# Altium PCB COMMS_ECU_revA.PcbDoc (part 1 of 6)
Units mm, origin at the board's own origin, x right, y up, seen from the top; angles counter-clockwise.
Board outline 370 x 261 mm, 6 copper layers (Top Layer, Mid Layer 1, Mid Layer 2, Mid Layer 3, Mid Layer 4, Bottom Layer), stack 1.538 mm thick; 739 components, 500 nets, 2454 pads, 325 vias.
Unrouted connection lines stored in the file: 1573.
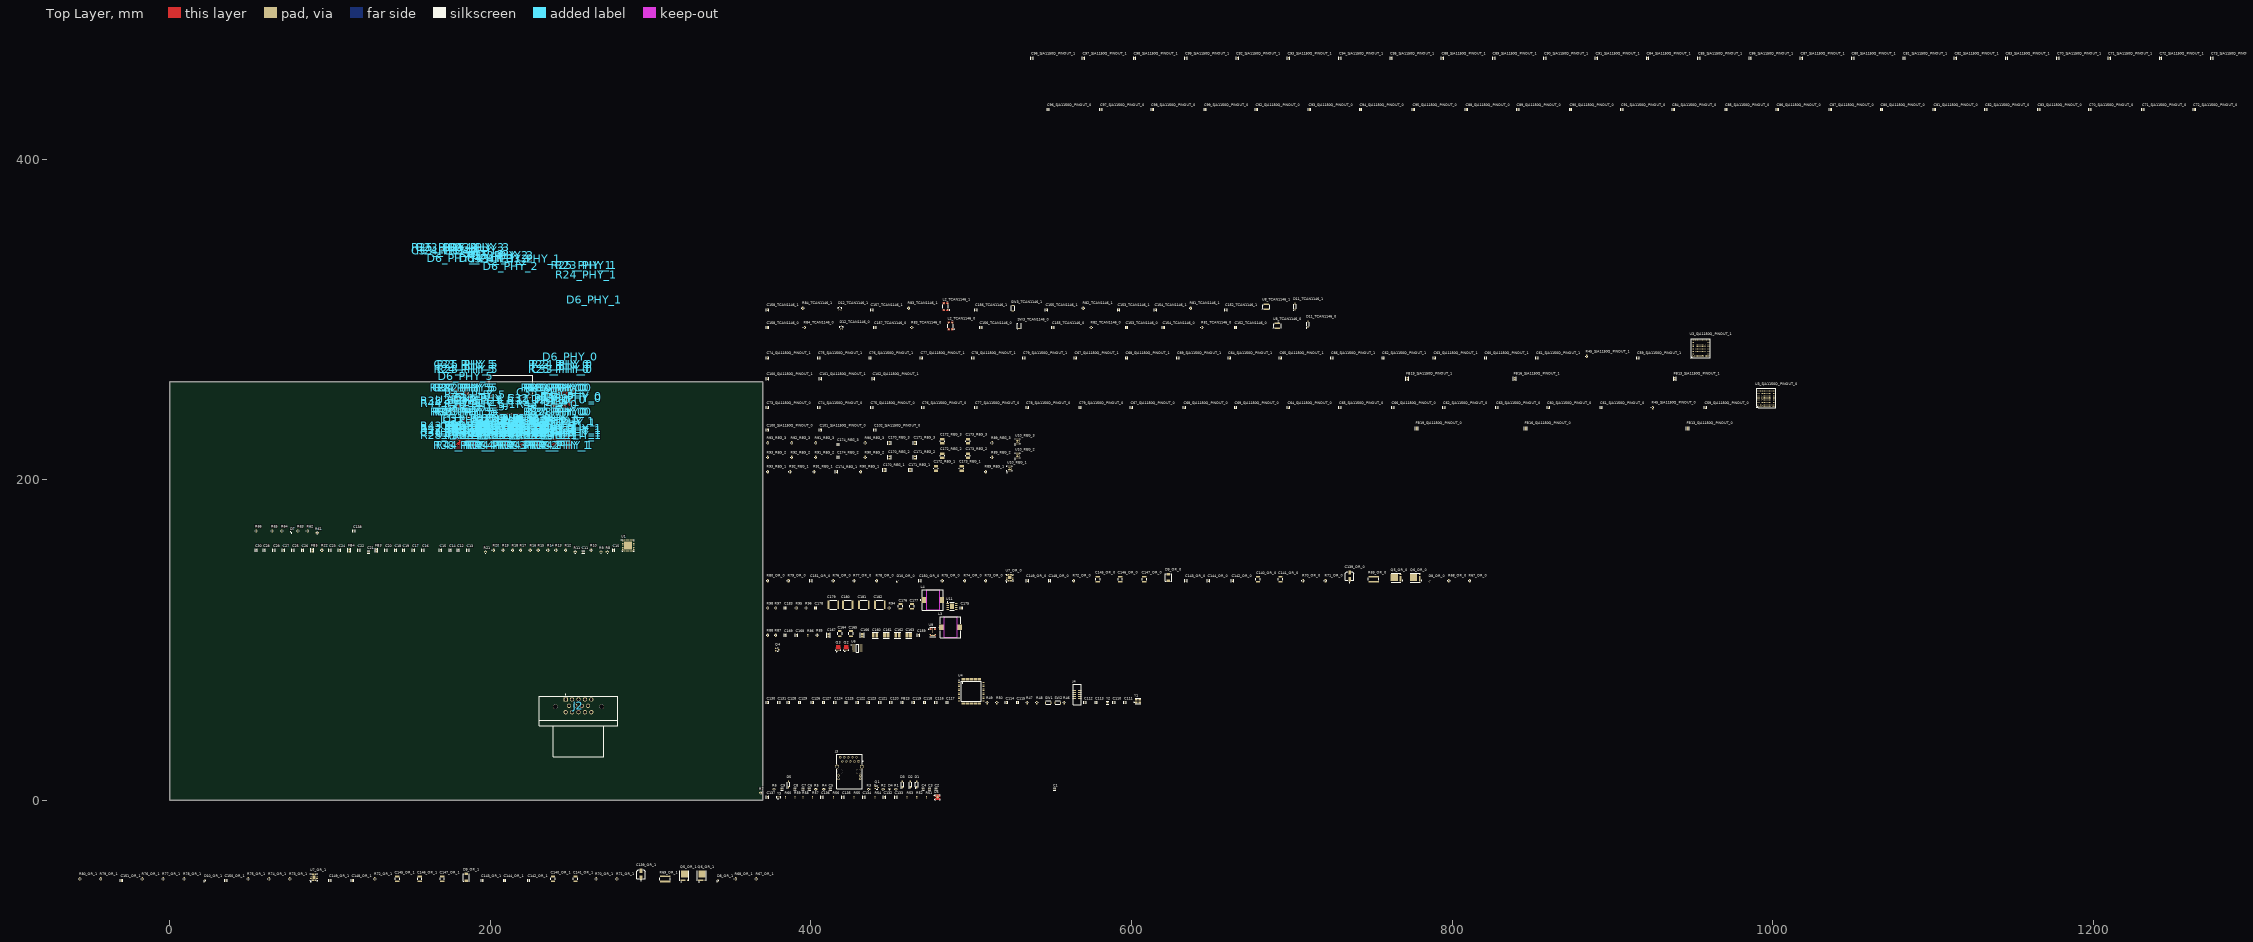
[diagram p0: Top Layer view]
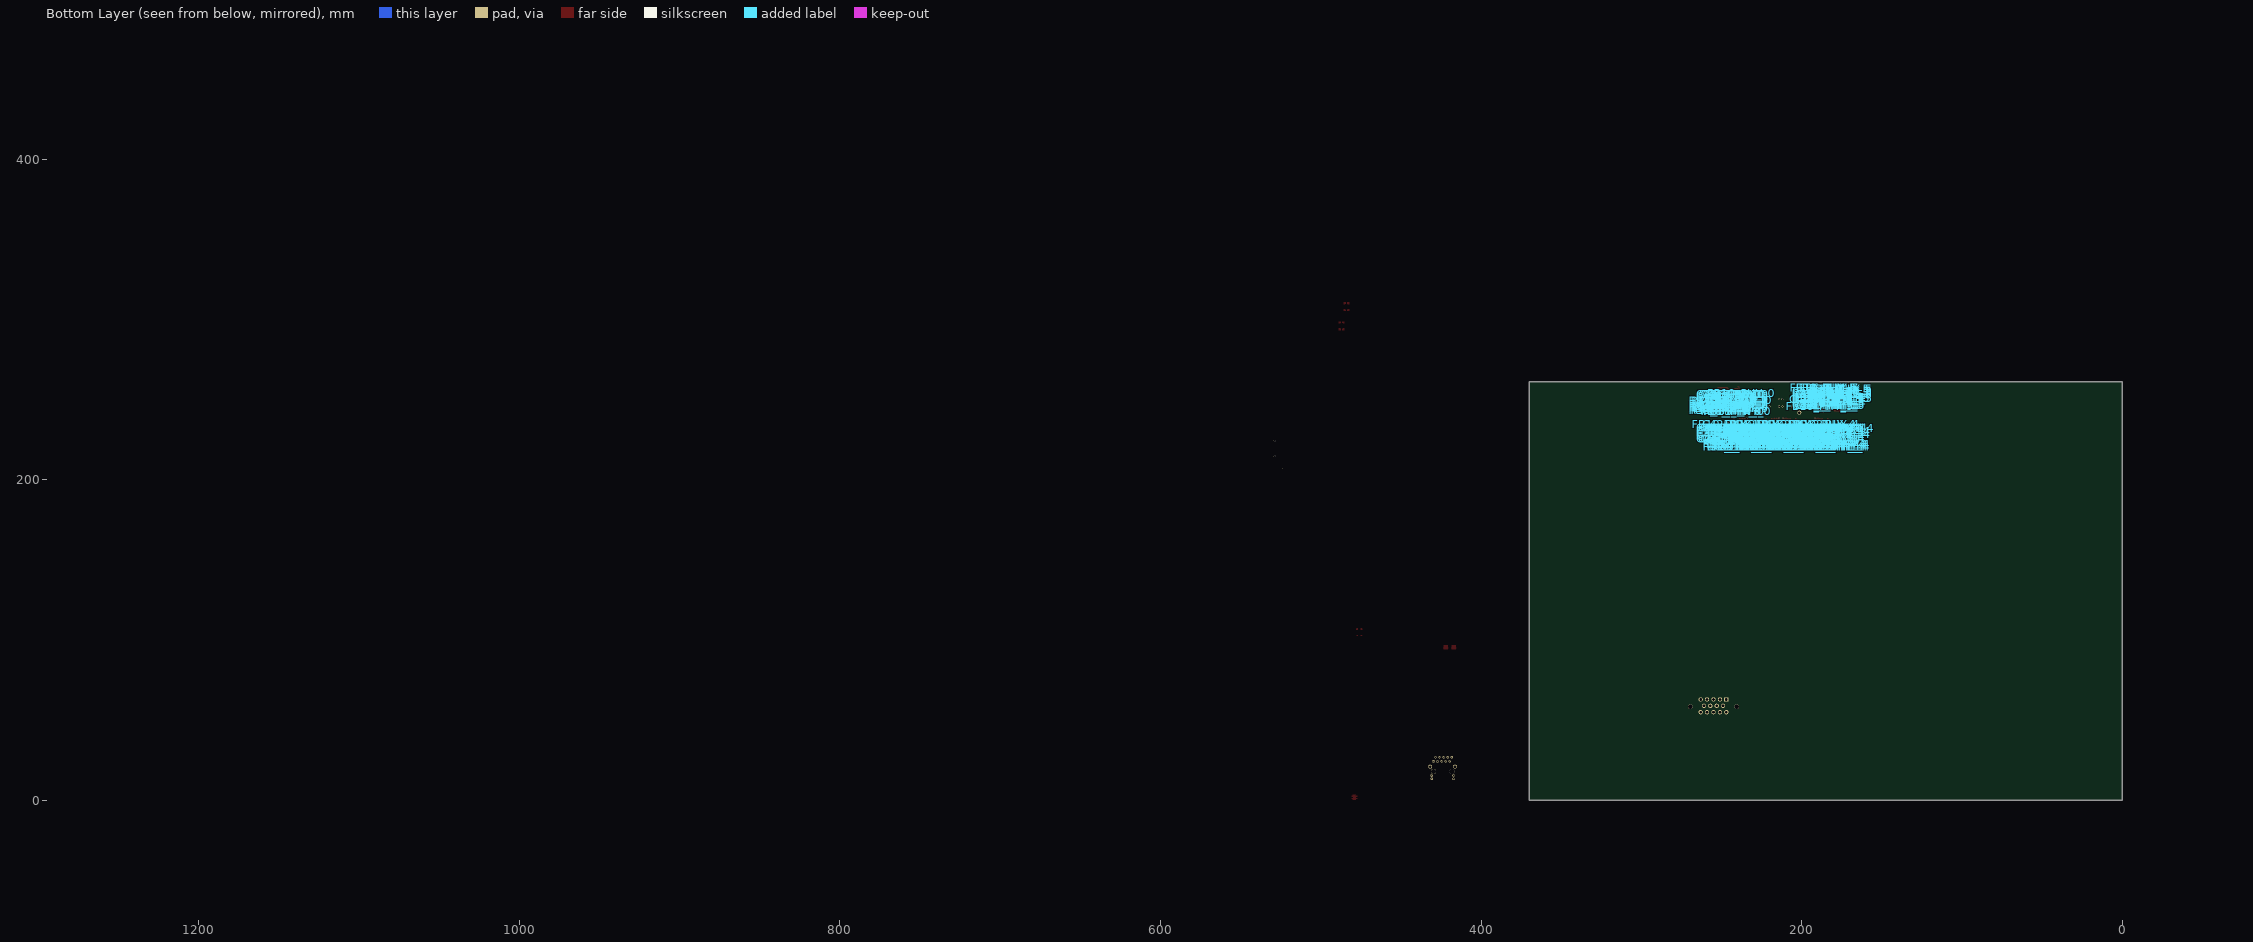
[diagram p1: Bottom Layer view, seen from below]

## Layer stack, top to bottom
Top Solder: solder mask 0.0127, Solder Resist, Dk 3.8
Top Layer: signal copper 0.035
Dielectric 1: prepreg 0.0994, PP-015, Dk 4.3
Mid Layer 1: signal copper 0.0152
Core 1: core 0.55, FR-4, Dk 4.5
Mid Layer 2: signal copper 0.0152
Dielectric 2: prepreg 0.1088, 2116, Dk 4.25
Mid Layer 3: signal copper 0.0152
Core 2: core 0.55, FR-4, Dk 4.5
Mid Layer 4: signal copper 0.0152
Dielectric 3: prepreg 0.0994, PP-015, Dk 4.3
Bottom Layer: signal copper 0.035
Bottom Solder: solder mask 0.0127, Solder Resist, Dk 3.8

## Board outline
0,0 0,261 370,261 370,0

## Design rules (kind name [scope] priority, off if disabled: settings)
BoardOutlineClearance [All] p1: gap=0.2 ignorepadtopadclearanceinfootprint=FALSE
Clearance IMPEDANCE_CLEARANCE [InDifferentialPairClass('100DIFF') or InNetClass('50SINGLE') vs InNet('GND')] p1: gap=0.5 ignorepadtopadclearanceinfootprint=FALSE except(0.089: Arc-Arc Arc-Track Arc-SMDPad Arc-THPad Arc-Text Track-Track Track-SMDPad Track-THPad Track-Text SMDPad-SMDPad SMDPad-THPad SMDPad-Text THPad-THPad THPad-Text Fill-Text Poly-Text Region-Text Text-Text; 0.127: Arc-Via Track-Via SMDPad-Via THPad-Via Via-Via Via-Text; 0.25: Arc-Hole Track-Hole SMDPad-Hole THPad-Hole Via-Hole Fill-Hole Poly-Hole Region-Hole Text-Hole)
Clearance [All] p2: gap=0.089 ignorepadtopadclearanceinfootprint=FALSE except(0.127: Arc-Via Track-Via SMDPad-Via THPad-Via Via-Via Via-Fill Via-Poly Via-Region Via-Text; 0.25: Arc-Hole Track-Hole SMDPad-Hole THPad-Hole Via-Hole Fill-Hole Poly-Hole Region-Hole Text-Hole)
ComponentClearance [All] p1: gap=0.089 collisioncheckmode=3 verticalgap=0.089 showdistances=TRUE
DiffPairsRouting 100OHM [InDifferentialPairClass('100DIFF')] p1: maxlimit=0.2 minlimit=0.127 mostfreqgap=0.127 toplayer_mingap=0.2 toplayer_prefgap=0.2 toplayer_minwidth=0.123 toplayer_maxwidth=0.123 toplayer_prefwidth=0.123 midlayer1_maxgap=0.127 midlayer1_minwidth=0.074 midlayer1_maxwidth=0.074 midlayer1_prefwidth=0.074 midlayer2_maxgap=0.127 midlayer2_minwidth=0.078 midlayer2_maxwidth=0.078 midlayer2_prefwidth=0.078 midlayer3_maxgap=0.127 midlayer3_minwidth=0.078 midlayer3_maxwidth=0.078 midlayer3_prefwidth=0.078 midlayer4_maxgap=0.127 midlayer4_minwidth=0.074 midlayer4_maxwidth=0.074 midlayer4_prefwidth=0.074 bottomlayer_mingap=0.2 bottomlayer_prefgap=0.2 bottomlayer_minwidth=0.123 bottomlayer_maxwidth=0.123 bottomlayer_prefwidth=0.123 impedanceprofiledriven=TRUE impedanceprofileid={4005660A-A687-4855-991E-D4003F8F5FAE} impedanceprofilevalue=100.000000 maxuncoupledlength=12.7
DiffPairsRouting [All] p2: maxlimit=0.089 minlimit=0.089 mostfreqgap=0.089 toplayer_minwidth=0.089 toplayer_maxwidth=1816.048 toplayer_prefwidth=0.2 midlayer1_minwidth=0.089 midlayer1_maxwidth=1816.048 midlayer1_prefwidth=0.2 midlayer2_minwidth=0.089 midlayer2_maxwidth=1816.048 midlayer2_prefwidth=0.2 midlayer3_minwidth=0.089 midlayer3_maxwidth=1816.048 midlayer3_prefwidth=0.2 midlayer4_minwidth=0.089 midlayer4_maxwidth=1816.048 midlayer4_prefwidth=0.2 bottomlayer_minwidth=0.089 bottomlayer_maxwidth=1816.048 bottomlayer_prefwidth=0.2 maxuncoupledlength=12.7
Height [All] p1: minheight=0 maxheight=1816.048 prefheight=12.7
HoleSize [All] p1: absolutevalues=TRUE maxlimit=6.3 minlimit=0.2 maxpercent=80.000 minpercent=20.000
HoleToHoleClearance [All] p1: gap=0.25 allowstackedmicrovias=FALSE
MinimumAnnularRing [All] p1: minimumring=0.076
MinimumSolderMaskSliver [All] p1: minsoldermaskwidth=0
PlaneClearance [All] p1: clearance=0.089
PlaneConnect PlaneConnectPowerPads [InNetClass('PWR')] p1: planeconnectstyle=Direct reliefexpansion=0.508 reliefentries=4 reliefconductorwidth=0.254 reliefairgap=0.254
PlaneConnect [All] p2: pad.planeconnectstyle=Relief pad.reliefexpansion=0.3 pad.reliefentries=4 pad.reliefconductorwidth=0.089 pad.reliefairgap=0.089 via.planeconnectstyle=Direct via.reliefexpansion=0.3 via.reliefentries=4 via.reliefconductorwidth=0.127 via.reliefairgap=0.127
PolygonConnect PolygonConnectPowerPads [All vs InNetClass('PWR')] p1: connectstyle=Direct reliefconductorwidth=0.254 reliefentries=4 polygonreliefangle="90 Angle" airgapwidth=0.254
PolygonConnect [All] p2: thpad.connectstyle=Relief thpad.reliefconductorwidth=0.089 thpad.reliefentries=4 thpad.polygonreliefangle="90 Angle" thpad.airgapwidth=0.089 smdpad.connectstyle=Relief smdpad.reliefconductorwidth=0.089 smdpad.reliefentries=4 smdpad.polygonreliefangle="90 Angle" smdpad.airgapwidth=0.089 via.connectstyle=Direct via.reliefconductorwidth=0.127 via.reliefentries=4 via.polygonreliefangle="90 Angle" via.airgapwidth=0.127
RoomDefinition PHY_0 [InComponentClass('PHY_0')] p1: confinementstyle=ConfineIn formatcopy=TRUE lockcomponents=FALSE outline 227,240 253,240 253,260 227,260
RoomDefinition PHY_3 [InComponentClass('PHY_3')] p2: confinementstyle=ConfineIn formatcopy=TRUE lockcomponents=FALSE outline 193,240 193,219 213,219 213,240
RoomDefinition PHY_2 [InComponentClass('PHY_2')] p3: confinementstyle=ConfineIn formatcopy=TRUE lockcomponents=FALSE outline 213,240 213,219 233,219 233,240
RoomDefinition PHY_4 [InComponentClass('PHY_4')] p4: confinementstyle=ConfineIn formatcopy=TRUE lockcomponents=FALSE outline 173,240 173,219 193,219 193,240
RoomDefinition PHY_1 [InComponentClass('PHY_1')] p5: confinementstyle=ConfineIn formatcopy=TRUE lockcomponents=FALSE outline 233,240 233,219 253,219 253,240
RoomDefinition PHY_5 [InComponentClass('PHY_5')] p6: confinementstyle=ConfineIn formatcopy=TRUE lockcomponents=FALSE outline 199,260 173,260 173,240 199,240
RoutingVias [All] p1: holewidth=0.2 width=0.45 viastyle="Through Hole" minholewidth=0.2 minwidth=0.45 maxholewidth=6.3 maxwidth=6.55
SilkToSilkClearance [All] p1: silktosilkclearance=0
SilkToSolderMaskClearance [IsPad] p1: minsilkscreentomaskgap=0.089 clearancetoexposedcopper=TRUE
SolderMaskExpansion [All] p1: expansion=0.075 istentingtop=FALSE
SupplyNets "Schematic Supply Nets_2" [InNet('3V3')] p1: voltage=0.000
SupplyNets "Schematic Supply Nets_31" [InNet('CAR_VCC')] p2: voltage=0.000
SupplyNets "Schematic Supply Nets_30" [InNet('1V1_8870')] p3: voltage=0.000
SupplyNets "Schematic Supply Nets_29" [InNet('PRE_VCC')] p4: voltage=0.000
SupplyNets "Schematic Supply Nets_28" [InNet('5V0_INT')] p5: voltage=0.000
SupplyNets "Schematic Supply Nets_27" [InNet('1V2_SW0')] p6: voltage=0.000
SupplyNets "Schematic Supply Nets_26" [InNet('1V2_SW1')] p7: voltage=0.000
SupplyNets "Schematic Supply Nets_25" [InNet('3V3_LED')] p8: voltage=0.000
SupplyNets "Schematic Supply Nets_24" [InNet('APM_VCC')] p9: voltage=0.000
SupplyNets "Schematic Supply Nets_12" [InNet('1V1_8830')] p10: voltage=0.000
SupplyNets "Schematic Supply Nets_4" [InNet('3V3_INT')] p11: voltage=0.000
SupplyNets "Schematic Supply Nets_23" [InNet('8830_1V1')] p12: voltage=0.000
SupplyNets "Schematic Supply Nets_22" [InNet('8870_1V1')] p13: voltage=0.000
SupplyNets "Schematic Supply Nets_19" [InNet('SW_VDD_CORE')] p14: voltage=0.000
SupplyNets "Schematic Supply Nets_18" [InNet('VCC')] p15: voltage=0.000
SupplyNets "Schematic Supply Nets_16" [InNet('SW_VDDA_PLL')] p16: voltage=0.000
SupplyNets "Schematic Supply Nets_15" [InNet('SW_VDDA_OSC')] p17: voltage=0.000
SupplyNets "Schematic Supply Nets_10" [InNet('GND')] p18: voltage=0.000
SupplyNets "Schematic Supply Nets_6" [InNet('P1_GND')] p19: voltage=0.000
SupplyNets "Schematic Supply Nets_5" [InNet('RJ45_GND')] p20: voltage=0.000
SupplyNets "Schematic Supply Nets" [InNet('1V2')] p21: voltage=0.000
Width 50OHM [InNetClass('50SINGLE')] p1: maxlimit=0.156 minlimit=0.108 preferedwidth=0.117 toplayer_minwidth=0.156 toplayer_prefwidth=0.156 midlayer1_maxwidth=0.108 midlayer1_prefwidth=0.108 midlayer2_minwidth=0.117 midlayer2_maxwidth=0.117 midlayer3_minwidth=0.117 midlayer3_maxwidth=0.117 midlayer4_maxwidth=0.108 midlayer4_prefwidth=0.108 bottomlayer_minwidth=0.156 bottomlayer_prefwidth=0.156 impedanceprofiledriven=TRUE impedanceprofileid={5E2FF5BF-0F85-430B-B433-FDF321D4F5A7} impedanceprofilevalue=50.000000 minimp=50.000000 maximp=50.000000 favimp=50.000000
Width [All] p2: maxlimit=1816.048 minlimit=0.089 preferedwidth=0.089
20 further rules are at their usual default settings.

## Classes and differential pairs
differential pair class CAN: CAN0 CAN1 PRE_CAN_TCAN1146_0 PRE_CAN_TCAN1146_1
differential pair class 1000BASET: LAN8830_TXRXA LAN8830_TXRXB LAN8830_TXRXC LAN8830_TXRXD
differential pair class 100DIFF: LAN8830_TXRXA LAN8830_TXRXB LAN8830_TXRXC LAN8830_TXRXD P0_TRX P1_TRX P2_TRX P3_TRX P4_TRX P5_TRX TRX_PHY_0 TRX_PHY_1 TRX_PHY_2 TRX_PHY_3 TRX_PHY_4 TRX_PHY_5 TRX_TERM_PHY_0 TRX_TERM_PHY_1 TRX_TERM_PHY_2 TRX_TERM_PHY_3 TRX_TERM_PHY_4 TRX_TERM_PHY_5
channel class TCAN1146_PINOUT: TCAN1146_0 TCAN1146_1
channel class SJA1105Q_PINOUT: SJA1150Q_PINOUT_0 SJA1150Q_PINOUT_1
channel class MCP1726_PINOUT: REG_1 REG_2 REG_3
channel class LM74910H_PINOUT: OR_0 OR_1
channel class LAN8870_PINOUT: PHY_0 PHY_1 PHY_2 PHY_3 PHY_4 PHY_5
net class PWR: 1V1_8830 1V1_8870 1V2 1V2_SW0 1V2_SW1 3V3 8830_1V1 8870_1V1 APM_VCC CAR_VCC LAN8870_VBAT_PHY_0 LAN8870_VBAT_PHY_1 LAN8870_VBAT_PHY_2 LAN8870_VBAT_PHY_3 LAN8870_VBAT_PHY_4 LAN8870_VBAT_PHY_5 LAN8870_VDDA_PHY_0 LAN8870_VDDA_PHY_1 LAN8870_VDDA_PHY_2 LAN8870_VDDA_PHY_3 LAN8870_VDDA_PHY_4 LAN8870_VDDA_PHY_5 LM61495Q3_VCC LM74910H_VS_OR_0 LM74910H_VS_OR_1 NetC23_1 NetC25_1 NetC28_1 NetC36_PHY_0_1 NetC36_PHY_1_1 NetC36_PHY_2_1 NetC36_PHY_3_1 NetC36_PHY_4_1 NetC36_PHY_5_1 NetC42_PHY_0_1 NetC42_PHY_1_1 NetC42_PHY_2_1 NetC42_PHY_3_1 NetC42_PHY_4_1 NetC42_PHY_5_1 NetC142_OR_0_2 NetC142_OR_1_2 NetC159_2 NetQ2_5-6-7-8 PRE_VCC RJ45_GND SW_VDD_CORE SW_VDDA_OSC SW_VDDA_PLL VCC
net class P4_TXD: LAN8870_TX_CLK_PHY_4 LAN8870_TX_CTL_PHY_4 LAN8870_TXD0_PHY_4 LAN8870_TXD1_PHY_4 LAN8870_TXD2_PHY_4 LAN8870_TXD3_PHY_4
net class P4_RXD: LAN8870_RX_CLK_PHY_4 LAN8870_RXCTL_PHY_4 LAN8870_RXD0_PHY_4 LAN8870_RXD1_PHY_4 LAN8870_RXD2_PHY_4 LAN8870_RXD3_PHY_4
net class P3_TXD: LAN8870_TX_CLK_PHY_3 LAN8870_TX_CTL_PHY_3 LAN8870_TXD0_PHY_3 LAN8870_TXD1_PHY_3 LAN8870_TXD2_PHY_3 LAN8870_TXD3_PHY_3
net class P3_RXD: LAN8870_RX_CLK_PHY_3 LAN8870_RXCTL_PHY_3 LAN8870_RXD0_PHY_3 LAN8870_RXD1_PHY_3 LAN8870_RXD2_PHY_3 LAN8870_RXD3_PHY_3
net class P2_TXD: LAN8870_TX_CLK_PHY_2 LAN8870_TX_CTL_PHY_2 LAN8870_TXD0_PHY_2 LAN8870_TXD1_PHY_2 LAN8870_TXD2_PHY_2 LAN8870_TXD3_PHY_2
net class P2_RXD: LAN8870_RX_CLK_PHY_2 LAN8870_RXCTL_PHY_2 LAN8870_RXD0_PHY_2 LAN8870_RXD1_PHY_2 LAN8870_RXD2_PHY_2 LAN8870_RXD3_PHY_2
net class P1_TXD: LAN8870_TX_CLK_PHY_0 LAN8870_TX_CLK_PHY_1 LAN8870_TX_CLK_PHY_5 LAN8870_TX_CTL_PHY_0 LAN8870_TX_CTL_PHY_1 LAN8870_TX_CTL_PHY_5 LAN8870_TXD0_PHY_0 LAN8870_TXD0_PHY_1 LAN8870_TXD0_PHY_5 LAN8870_TXD1_PHY_0 LAN8870_TXD1_PHY_1 LAN8870_TXD1_PHY_5 LAN8870_TXD2_PHY_0 LAN8870_TXD2_PHY_1 LAN8870_TXD2_PHY_5 LAN8870_TXD3_PHY_0 LAN8870_TXD3_PHY_1 LAN8870_TXD3_PHY_5
net class P1_RXD: LAN8870_RX_CLK_PHY_0 LAN8870_RX_CLK_PHY_1 LAN8870_RX_CLK_PHY_5 LAN8870_RXCTL_PHY_0 LAN8870_RXCTL_PHY_1 LAN8870_RXCTL_PHY_5 LAN8870_RXD0_PHY_0 LAN8870_RXD0_PHY_1 LAN8870_RXD0_PHY_5 LAN8870_RXD1_PHY_0 LAN8870_RXD1_PHY_1 LAN8870_RXD1_PHY_5 LAN8870_RXD2_PHY_0 LAN8870_RXD2_PHY_1 LAN8870_RXD2_PHY_5 LAN8870_RXD3_PHY_0 LAN8870_RXD3_PHY_1 LAN8870_RXD3_PHY_5
net class P0_TXD: NetU1_19 NetU1_20 NetU1_21 NetU1_22 NetU1_25 NetU1_26
net class P0_RXD: LAN8830_CLK125_EN LAN8830_MODE0 LAN8830_MODE1 LAN8830_MODE2 LAN8830_MODE3 LAN8830_MODE4
net class INTP_TXD: NetU3_SJA1150Q_PINOUT_0_A2 NetU3_SJA1150Q_PINOUT_0_B1 NetU3_SJA1150Q_PINOUT_0_C1 NetU3_SJA1150Q_PINOUT_0_C2 NetU3_SJA1150Q_PINOUT_0_D1 NetU3_SJA1150Q_PINOUT_0_D2
net class INTP_RXD: NetU3_SJA1150Q_PINOUT_1_A2 NetU3_SJA1150Q_PINOUT_1_B1 NetU3_SJA1150Q_PINOUT_1_C1 NetU3_SJA1150Q_PINOUT_1_C2 NetU3_SJA1150Q_PINOUT_1_D1 NetU3_SJA1150Q_PINOUT_1_D2
net class CLK: 3V3_LAN8830_CLK 3V3_LAN8870_0_CLK 3V3_LAN8870_1_CLK 3V3_LAN8870_2_CLK 3V3_LAN8870_3_CLK 3V3_LAN8870_4_CLK 3V3_LAN8870_5_CLK 3V3_SJA1105_0_CLK 3V3_SJA1105_1_CLK
net class 50SINGLE: 3V3_LAN8830_CLK 3V3_LAN8870_0_CLK 3V3_LAN8870_1_CLK 3V3_LAN8870_2_CLK 3V3_LAN8870_3_CLK 3V3_LAN8870_4_CLK 3V3_LAN8870_5_CLK 3V3_SJA1105_0_CLK 3V3_SJA1105_1_CLK LAN8830_CLK125_EN LAN8830_MODE0 LAN8830_MODE1 LAN8830_MODE2 LAN8830_MODE3 LAN8830_MODE4 LAN8870_RX_CLK_PHY_0 LAN8870_RX_CLK_PHY_1 LAN8870_RX_CLK_PHY_2 LAN8870_RX_CLK_PHY_3 LAN8870_RX_CLK_PHY_4 LAN8870_RX_CLK_PHY_5 LAN8870_RXCTL_PHY_0 LAN8870_RXCTL_PHY_1 LAN8870_RXCTL_PHY_2 LAN8870_RXCTL_PHY_3 LAN8870_RXCTL_PHY_4 LAN8870_RXCTL_PHY_5 LAN8870_RXD0_PHY_0 LAN8870_RXD0_PHY_1 LAN8870_RXD0_PHY_2 LAN8870_RXD0_PHY_3 LAN8870_RXD0_PHY_4 LAN8870_RXD0_PHY_5 LAN8870_RXD1_PHY_0 LAN8870_RXD1_PHY_1 LAN8870_RXD1_PHY_2 LAN8870_RXD1_PHY_3 LAN8870_RXD1_PHY_4 LAN8870_RXD1_PHY_5 LAN8870_RXD2_PHY_0 LAN8870_RXD2_PHY_1 LAN8870_RXD2_PHY_2 LAN8870_RXD2_PHY_3 LAN8870_RXD2_PHY_4 LAN8870_RXD2_PHY_5 LAN8870_RXD3_PHY_0 LAN8870_RXD3_PHY_1 LAN8870_RXD3_PHY_2 LAN8870_RXD3_PHY_3 LAN8870_RXD3_PHY_4 LAN8870_RXD3_PHY_5 LAN8870_TX_CLK_PHY_0 LAN8870_TX_CLK_PHY_1 LAN8870_TX_CLK_PHY_2 LAN8870_TX_CLK_PHY_3 LAN8870_TX_CLK_PHY_4 LAN8870_TX_CLK_PHY_5 LAN8870_TX_CTL_PHY_0 LAN8870_TX_CTL_PHY_1 LAN8870_TX_CTL_PHY_2 LAN8870_TX_CTL_PHY_3 LAN8870_TX_CTL_PHY_4 LAN8870_TX_CTL_PHY_5 LAN8870_TXD0_PHY_0 LAN8870_TXD0_PHY_1 LAN8870_TXD0_PHY_2 LAN8870_TXD0_PHY_3 LAN8870_TXD0_PHY_4 LAN8870_TXD0_PHY_5 LAN8870_TXD1_PHY_0 LAN8870_TXD1_PHY_1 LAN8870_TXD1_PHY_2 LAN8870_TXD1_PHY_3 LAN8870_TXD1_PHY_4 LAN8870_TXD1_PHY_5 LAN8870_TXD2_PHY_0 LAN8870_TXD2_PHY_1 LAN8870_TXD2_PHY_2 LAN8870_TXD2_PHY_3 LAN8870_TXD2_PHY_4 LAN8870_TXD2_PHY_5 LAN8870_TXD3_PHY_0 LAN8870_TXD3_PHY_1 LAN8870_TXD3_PHY_2 LAN8870_TXD3_PHY_3 LAN8870_TXD3_PHY_4 LAN8870_TXD3_PHY_5 NetC10_1 NetC34_PHY_0_1 NetC34_PHY_1_1 NetC34_PHY_2_1 NetC34_PHY_3_1 NetC34_PHY_4_1 NetC34_PHY_5_1 NetC59_SJA1150Q_PINOUT_0_1 NetC59_SJA1150Q_PINOUT_1_1 NetU1_19 NetU1_20 NetU1_21 NetU1_22 NetU1_25 NetU1_26 NetU3_SJA1150Q_PINOUT_0_A2 NetU3_SJA1150Q_PINOUT_0_B1 NetU3_SJA1150Q_PINOUT_0_C1 NetU3_SJA1150Q_PINOUT_0_C2 NetU3_SJA1150Q_PINOUT_0_D1 NetU3_SJA1150Q_PINOUT_0_D2 NetU3_SJA1150Q_PINOUT_0_N4 NetU3_SJA1150Q_PINOUT_1_A2 NetU3_SJA1150Q_PINOUT_1_B1 NetU3_SJA1150Q_PINOUT_1_C1 NetU3_SJA1150Q_PINOUT_1_C2 NetU3_SJA1150Q_PINOUT_1_D1 NetU3_SJA1150Q_PINOUT_1_D2
component class TCAN1146_1: C152_TCAN1146_1 C153_TCAN1146_1 C154_TCAN1146_1 C155_TCAN1146_1 C156_TCAN1146_1 C157_TCAN1146_1 C158_TCAN1146_1 D11_TCAN1146_1 D12_TCAN1146_1 L2_TCAN1146_1 R81_TCAN1146_1 R82_TCAN1146_1 R83_TCAN1146_1 R84_TCAN1146_1 SW3_TCAN1146_1 U8_TCAN1146_1
component class TCAN1146_0: C152_TCAN1146_0 C153_TCAN1146_0 C154_TCAN1146_0 C155_TCAN1146_0 C156_TCAN1146_0 C157_TCAN1146_0 C158_TCAN1146_0 D11_TCAN1146_0 D12_TCAN1146_0 L2_TCAN1146_0 R81_TCAN1146_0 R82_TCAN1146_0 R83_TCAN1146_0 R84_TCAN1146_0 SW3_TCAN1146_0 U8_TCAN1146_0
component class SJA1150Q_PINOUT_1: C59_SJA1150Q_PINOUT_1 C60_SJA1150Q_PINOUT_1 C61_SJA1150Q_PINOUT_1 C62_SJA1150Q_PINOUT_1 C63_SJA1150Q_PINOUT_1 C64_SJA1150Q_PINOUT_1 C65_SJA1150Q_PINOUT_1 C66_SJA1150Q_PINOUT_1 C67_SJA1150Q_PINOUT_1 C68_SJA1150Q_PINOUT_1 C69_SJA1150Q_PINOUT_1 C70_SJA1150Q_PINOUT_1 C71_SJA1150Q_PINOUT_1 C72_SJA1150Q_PINOUT_1 C73_SJA1150Q_PINOUT_1 C74_SJA1150Q_PINOUT_1 C75_SJA1150Q_PINOUT_1 C76_SJA1150Q_PINOUT_1 C77_SJA1150Q_PINOUT_1 C78_SJA1150Q_PINOUT_1 C79_SJA1150Q_PINOUT_1 C80_SJA1150Q_PINOUT_1 C81_SJA1150Q_PINOUT_1 C82_SJA1150Q_PINOUT_1 C83_SJA1150Q_PINOUT_1 C84_SJA1150Q_PINOUT_1 C85_SJA1150Q_PINOUT_1 C86_SJA1150Q_PINOUT_1 C87_SJA1150Q_PINOUT_1 C88_SJA1150Q_PINOUT_1 C89_SJA1150Q_PINOUT_1 C90_SJA1150Q_PINOUT_1 C91_SJA1150Q_PINOUT_1 C92_SJA1150Q_PINOUT_1 C93_SJA1150Q_PINOUT_1 C94_SJA1150Q_PINOUT_1 C95_SJA1150Q_PINOUT_1 C96_SJA1150Q_PINOUT_1 C97_SJA1150Q_PINOUT_1 C98_SJA1150Q_PINOUT_1 C99_SJA1150Q_PINOUT_1 C100_SJA1150Q_PINOUT_1 C101_SJA1150Q_PINOUT_1 C102_SJA1150Q_PINOUT_1 FB13_SJA1150Q_PINOUT_1 FB16_SJA1150Q_PINOUT_1 FB19_SJA1150Q_PINOUT_1 R45_SJA1150Q_PINOUT_1 U3_SJA1150Q_PINOUT_1
component class SJA1150Q_PINOUT_0: C59_SJA1150Q_PINOUT_0 C60_SJA1150Q_PINOUT_0 C61_SJA1150Q_PINOUT_0 C62_SJA1150Q_PINOUT_0 C63_SJA1150Q_PINOUT_0 C64_SJA1150Q_PINOUT_0 C65_SJA1150Q_PINOUT_0 C66_SJA1150Q_PINOUT_0 C67_SJA1150Q_PINOUT_0 C68_SJA1150Q_PINOUT_0 C69_SJA1150Q_PINOUT_0 C70_SJA1150Q_PINOUT_0 C71_SJA1150Q_PINOUT_0 C72_SJA1150Q_PINOUT_0 C73_SJA1150Q_PINOUT_0 C74_SJA1150Q_PINOUT_0 C75_SJA1150Q_PINOUT_0 C76_SJA1150Q_PINOUT_0 C77_SJA1150Q_PINOUT_0 C78_SJA1150Q_PINOUT_0 C79_SJA1150Q_PINOUT_0 C80_SJA1150Q_PINOUT_0 C81_SJA1150Q_PINOUT_0 C82_SJA1150Q_PINOUT_0 C83_SJA1150Q_PINOUT_0 C84_SJA1150Q_PINOUT_0 C85_SJA1150Q_PINOUT_0 C86_SJA1150Q_PINOUT_0 C87_SJA1150Q_PINOUT_0 C88_SJA1150Q_PINOUT_0 C89_SJA1150Q_PINOUT_0 C90_SJA1150Q_PINOUT_0 C91_SJA1150Q_PINOUT_0 C92_SJA1150Q_PINOUT_0 C93_SJA1150Q_PINOUT_0 C94_SJA1150Q_PINOUT_0 C95_SJA1150Q_PINOUT_0 C96_SJA1150Q_PINOUT_0 C97_SJA1150Q_PINOUT_0 C98_SJA1150Q_PINOUT_0 C99_SJA1150Q_PINOUT_0 C100_SJA1150Q_PINOUT_0 C101_SJA1150Q_PINOUT_0 C102_SJA1150Q_PINOUT_0 FB13_SJA1150Q_PINOUT_0 FB16_SJA1150Q_PINOUT_0 FB19_SJA1150Q_PINOUT_0 R45_SJA1150Q_PINOUT_0 U3_SJA1150Q_PINOUT_0
component class REG_4: C175 C176 C177 C178 C179 C180 C181 C182 C183 L4 R94 R95 R96 R97 R98 U11
component class REG_3: C170_REG_3 C171_REG_3 C172_REG_3 C173_REG_3 C174_REG_3 R89_REG_3 R90_REG_3 R91_REG_3 R92_REG_3 R93_REG_3 U10_REG_3
component class REG_2: C170_REG_2 C171_REG_2 C172_REG_2 C173_REG_2 C174_REG_2 R89_REG_2 R90_REG_2 R91_REG_2 R92_REG_2 R93_REG_2 U10_REG_2
component class REG_1: C170_REG_1 C171_REG_1 C172_REG_1 C173_REG_1 C174_REG_1 R89_REG_1 R90_REG_1 R91_REG_1 R92_REG_1 R93_REG_1 U10_REG_1
component class REG_0: C159 C160 C161 C162 C163 C164 C165 C166 C167 C168 C169 L3 R85 R86 R87 R88 U9
component class PWR_SW_AND_PROT_0: C138 D7 Q2 Q3 Q4 R61 R62 R63 R64 R65 R66 U6
component class PHY_6: C10 C11 C12 C13 C14 C15 C16 C17 C18 C19 C20 C21 C22 C23 C24 C25 C26 C27 C28 C29 C30 FB3 FB4 FB5 R8 R9 R10 R11 R12 R13 R14 R15 R16 R17 R18 R19 R20 R21 R22 U1
component class PHY_5: C31_PHY_5 C32_PHY_5 C33_PHY_5 C34_PHY_5 C35_PHY_5 C36_PHY_5 C37_PHY_5 C38_PHY_5 C39_PHY_5 C40_PHY_5 C41_PHY_5 C42_PHY_5 C43_PHY_5 C44_PHY_5 C45_PHY_5 C46_PHY_5 C47_PHY_5 C48_PHY_5 C49_PHY_5 C50_PHY_5 C51_PHY_5 C52_PHY_5 C53_PHY_5 C54_PHY_5 C55_PHY_5 C56_PHY_5 C57_PHY_5 C58_PHY_5 D6_PHY_5 FB6_PHY_5 FB8_PHY_5 FB10_PHY_5 FB11_PHY_5 L1_PHY_5 R23_PHY_5 R24_PHY_5 R25_PHY_5 R26_PHY_5 R27_PHY_5 R28_PHY_5 R29_PHY_5 R30_PHY_5 R31_PHY_5 R32_PHY_5 R33_PHY_5 R34_PHY_5 R35_PHY_5 R36_PHY_5 R37_PHY_5 R38_PHY_5 R39_PHY_5 R40_PHY_5 R41_PHY_5 R42_PHY_5 R43_PHY_5 R44_PHY_5 R99_PHY_5 U2_PHY_5
component class PHY_4: C31_PHY_4 C32_PHY_4 C33_PHY_4 C34_PHY_4 C35_PHY_4 C36_PHY_4 C37_PHY_4 C38_PHY_4 C39_PHY_4 C40_PHY_4 C41_PHY_4 C42_PHY_4 C43_PHY_4 C44_PHY_4 C45_PHY_4 C46_PHY_4 C47_PHY_4 C48_PHY_4 C49_PHY_4 C50_PHY_4 C51_PHY_4 C52_PHY_4 C53_PHY_4 C54_PHY_4 C55_PHY_4 C56_PHY_4 C57_PHY_4 C58_PHY_4 D6_PHY_4 FB6_PHY_4 FB8_PHY_4 FB10_PHY_4 FB11_PHY_4 L1_PHY_4 R23_PHY_4 R24_PHY_4 R25_PHY_4 R26_PHY_4 R27_PHY_4 R28_PHY_4 R29_PHY_4 R30_PHY_4 R31_PHY_4 R32_PHY_4 R33_PHY_4 R34_PHY_4 R35_PHY_4 R36_PHY_4 R37_PHY_4 R38_PHY_4 R39_PHY_4 R40_PHY_4 R41_PHY_4 R42_PHY_4 R43_PHY_4 R44_PHY_4 R99_PHY_4 U2_PHY_4
component class PHY_3: C31_PHY_3 C32_PHY_3 C33_PHY_3 C34_PHY_3 C35_PHY_3 C36_PHY_3 C37_PHY_3 C38_PHY_3 C39_PHY_3 C40_PHY_3 C41_PHY_3 C42_PHY_3 C43_PHY_3 C44_PHY_3 C45_PHY_3 C46_PHY_3 C47_PHY_3 C48_PHY_3 C49_PHY_3 C50_PHY_3 C51_PHY_3 C52_PHY_3 C53_PHY_3 C54_PHY_3 C55_PHY_3 C56_PHY_3 C57_PHY_3 C58_PHY_3 D6_PHY_3 FB6_PHY_3 FB8_PHY_3 FB10_PHY_3 FB11_PHY_3 L1_PHY_3 R23_PHY_3 R24_PHY_3 R25_PHY_3 R26_PHY_3 R27_PHY_3 R28_PHY_3 R29_PHY_3 R30_PHY_3 R31_PHY_3 R32_PHY_3 R33_PHY_3 R34_PHY_3 R35_PHY_3 R36_PHY_3 R37_PHY_3 R38_PHY_3 R39_PHY_3 R40_PHY_3 R41_PHY_3 R42_PHY_3 R43_PHY_3 R44_PHY_3 R99_PHY_3 U2_PHY_3
component class PHY_2: C31_PHY_2 C32_PHY_2 C33_PHY_2 C34_PHY_2 C35_PHY_2 C36_PHY_2 C37_PHY_2 C38_PHY_2 C39_PHY_2 C40_PHY_2 C41_PHY_2 C42_PHY_2 C43_PHY_2 C44_PHY_2 C45_PHY_2 C46_PHY_2 C47_PHY_2 C48_PHY_2 C49_PHY_2 C50_PHY_2 C51_PHY_2 C52_PHY_2 C53_PHY_2 C54_PHY_2 C55_PHY_2 C56_PHY_2 C57_PHY_2 C58_PHY_2 D6_PHY_2 FB6_PHY_2 FB8_PHY_2 FB10_PHY_2 FB11_PHY_2 L1_PHY_2 R23_PHY_2 R24_PHY_2 R25_PHY_2 R26_PHY_2 R27_PHY_2 R28_PHY_2 R29_PHY_2 R30_PHY_2 R31_PHY_2 R32_PHY_2 R33_PHY_2 R34_PHY_2 R35_PHY_2 R36_PHY_2 R37_PHY_2 R38_PHY_2 R39_PHY_2 R40_PHY_2 R41_PHY_2 R42_PHY_2 R43_PHY_2 R44_PHY_2 R99_PHY_2 U2_PHY_2
component class PHY_1: C31_PHY_1 C32_PHY_1 C33_PHY_1 C34_PHY_1 C35_PHY_1 C36_PHY_1 C37_PHY_1 C38_PHY_1 C39_PHY_1 C40_PHY_1 C41_PHY_1 C42_PHY_1 C43_PHY_1 C44_PHY_1 C45_PHY_1 C46_PHY_1 C47_PHY_1 C48_PHY_1 C49_PHY_1 C50_PHY_1 C51_PHY_1 C52_PHY_1 C53_PHY_1 C54_PHY_1 C55_PHY_1 C56_PHY_1 C57_PHY_1 C58_PHY_1 D6_PHY_1 FB6_PHY_1 FB8_PHY_1 FB10_PHY_1 FB11_PHY_1 L1_PHY_1 R23_PHY_1 R24_PHY_1 R25_PHY_1 R26_PHY_1 R27_PHY_1 R28_PHY_1 R29_PHY_1 R30_PHY_1 R31_PHY_1 R32_PHY_1 R33_PHY_1 R34_PHY_1 R35_PHY_1 R36_PHY_1 R37_PHY_1 R38_PHY_1 R39_PHY_1 R40_PHY_1 R41_PHY_1 R42_PHY_1 R43_PHY_1 R44_PHY_1 R99_PHY_1 U2_PHY_1
component class PHY_0: C31_PHY_0 C32_PHY_0 C33_PHY_0 C34_PHY_0 C35_PHY_0 C36_PHY_0 C37_PHY_0 C38_PHY_0 C39_PHY_0 C40_PHY_0 C41_PHY_0 C42_PHY_0 C43_PHY_0 C44_PHY_0 C45_PHY_0 C46_PHY_0 C47_PHY_0 C48_PHY_0 C49_PHY_0 C50_PHY_0 C51_PHY_0 C52_PHY_0 C53_PHY_0 C54_PHY_0 C55_PHY_0 C56_PHY_0 C57_PHY_0 C58_PHY_0 D6_PHY_0 FB6_PHY_0 FB8_PHY_0 FB10_PHY_0 FB11_PHY_0 L1_PHY_0 R23_PHY_0 R24_PHY_0 R25_PHY_0 R26_PHY_0 R27_PHY_0 R28_PHY_0 R29_PHY_0 R30_PHY_0 R31_PHY_0 R32_PHY_0 R33_PHY_0 R34_PHY_0 R35_PHY_0 R36_PHY_0 R37_PHY_0 R38_PHY_0 R39_PHY_0 R40_PHY_0 R41_PHY_0 R42_PHY_0 R43_PHY_0 R44_PHY_0 R99_PHY_0 U2_PHY_0
component class OR_1: C139_OR_1 C140_OR_1 C141_OR_1 C142_OR_1 C143_OR_1 C144_OR_1 C145_OR_1 C146_OR_1 C147_OR_1 C148_OR_1 C149_OR_1 C150_OR_1 C151_OR_1 D8_OR_1 D9_OR_1 D10_OR_1 Q5_OR_1 Q6_OR_1 R67_OR_1 R68_OR_1 R69_OR_1 R70_OR_1 R71_OR_1 R72_OR_1 R73_OR_1 R74_OR_1 R75_OR_1 R76_OR_1 R77_OR_1 R78_OR_1 R79_OR_1 R80_OR_1 U7_OR_1
component class OR_0: C139_OR_0 C140_OR_0 C141_OR_0 C142_OR_0 C143_OR_0 C144_OR_0 C145_OR_0 C146_OR_0 C147_OR_0 C148_OR_0 C149_OR_0 C150_OR_0 C151_OR_0 D8_OR_0 D9_OR_0 D10_OR_0 Q5_OR_0 Q6_OR_0 R67_OR_0 R68_OR_0 R69_OR_0 R70_OR_0 R71_OR_0 R72_OR_0 R73_OR_0 R74_OR_0 R75_OR_0 R76_OR_0 R77_OR_0 R78_OR_0 R79_OR_0 R80_OR_0 U7_OR_0
component class MCU_0: C110 C111 C112 C113 C114 C115 C116 C117 C118 C119 C120 C121 C122 C123 C124 C125 C126 C127 C128 C129 C130 C131 FB23 J4 R46 R47 R48 R49 R50 SW1 SW2 U4 Y1 Y2
component class COMMS_ECU_revA: C1 C2 C3 C4 C5 C6 C7 C8 C9 D1 D2 D3 D4 D5 J1 J2 J3 Q1 R1 R2 R3 R4 R5 R6 R7
component class CLOCK_GEN_0: C132 C133 C134 C135 C136 C137 R51 R52 R53 R54 R55 R56 R57 R58 R59 R60 U5 Y3
differential pair X: +X_P -X_N
differential pair X32: +X32_P -X32_N
differential pair TRX_TERM_PHY_5: +TRX_TERM_PHY_5_P -TRX_TERM_PHY_5_N
differential pair TRX_TERM_PHY_4: +TRX_TERM_PHY_4_P -TRX_TERM_PHY_4_N
differential pair TRX_TERM_PHY_3: +TRX_TERM_PHY_3_P -TRX_TERM_PHY_3_N
differential pair TRX_TERM_PHY_2: +TRX_TERM_PHY_2_P -TRX_TERM_PHY_2_N
differential pair TRX_TERM_PHY_1: +TRX_TERM_PHY_1_P -TRX_TERM_PHY_1_N
differential pair TRX_TERM_PHY_0: +TRX_TERM_PHY_0_P -TRX_TERM_PHY_0_N
differential pair TRX_PHY_5: +TRX_PHY_5_P -TRX_PHY_5_N
differential pair TRX_PHY_4: +TRX_PHY_4_P -TRX_PHY_4_N
differential pair TRX_PHY_3: +TRX_PHY_3_P -TRX_PHY_3_N
differential pair TRX_PHY_2: +TRX_PHY_2_P -TRX_PHY_2_N
differential pair TRX_PHY_1: +TRX_PHY_1_P -TRX_PHY_1_N
differential pair TRX_PHY_0: +TRX_PHY_0_P -TRX_PHY_0_N
differential pair PRE_CAN_TCAN1146_1: +PRE_CAN_TCAN1146_1_P -PRE_CAN_TCAN1146_1_N
differential pair PRE_CAN_TCAN1146_0: +PRE_CAN_TCAN1146_0_P -PRE_CAN_TCAN1146_0_N
differential pair P5_TRX: +P5_TRX_P -P5_TRX_N
differential pair P4_TRX: +P4_TRX_P -P4_TRX_N
differential pair P3_TRX: +P3_TRX_P -P3_TRX_N
differential pair P2_TRX: +P2_TRX_P -P2_TRX_N
differential pair P1_TRX: +P1_TRX_P -P1_TRX_N
differential pair P0_TRX: +P0_TRX_P -P0_TRX_N
differential pair LAN8830_TXRXD: +LAN8830_TXRXD_P -LAN8830_TXRXD_N
differential pair LAN8830_TXRXC: +LAN8830_TXRXC_P -LAN8830_TXRXC_N
differential pair LAN8830_TXRXB: +LAN8830_TXRXB_P -LAN8830_TXRXB_N
differential pair LAN8830_TXRXA: +LAN8830_TXRXA_P -LAN8830_TXRXA_N
differential pair CAN1: +CAN1_P -CAN1_N
differential pair CAN0: +CAN0_P -CAN0_N

## Components (designator, comment, footprint, x,y, rotation, side; value= is the part's Value field where it differs from the comment)
C1 "JUMP" FP-0402-L_1_0_0_05-W_0_5-IPC_A 552.001,7 r0 top
C2 "JUMP" FP-0402-L_1_0_0_05-W_0_5-IPC_A 478.001,7 r0 top
C3 "JUMP" FP-0402-L_1_0_0_05-W_0_5-IPC_A 474.001,7 r0 top
C4 "JUMP" FP-0402-L_1_0_0_05-W_0_5-IPC_A 470.001,7 r0 top
C5 "100n" FP-0402-L_1_0_0_05-W_0_5-IPC_A 412.001,7 r0 top
C6 "JUMP" FP-0402-L_1_0_0_05-W_0_5-IPC_A 399.001,7 r0 top
C7 "JUMP" FP-0402-L_1_0_0_05-W_0_5-IPC_A 395.001,7 r0 top
C8 "JUMP" FP-0402-L_1_0_0_05-W_0_5-IPC_A 390.001,7 r0 top
C9 "JUMP" FP-0402-L_1_0_0_05-W_0_5-IPC_A 382.001,7 r0 top
C10 "100p" FP-0402-L_1_0_0_05-W_0_5-IPC_A 277.001,156 r90 top
C11 "1u" FP-0402-L_1_0_0_05-W_0_5-IPC_A 258.001,155 r0 top
C12 "1u" FP-0402-L_1_0_0_05-W_0_5-IPC_A 180.001,156 r90 top
C13 "100n" FP-0402-L_1_0_0_05-W_0_5-IPC_A 186.001,156 r90 top
C14 "100n" FP-0402-L_1_0_0_05-W_0_5-IPC_A 175.001,156 r90 top
C15 "100n" FP-0402-L_1_0_0_05-W_0_5-IPC_A 169.001,156 r90 top
C16 "100n" FP-0402-L_1_0_0_05-W_0_5-IPC_A 158.001,156 r90 top
C17 "100n" FP-0402-L_1_0_0_05-W_0_5-IPC_A 152.001,156 r90 top
C18 "10u" FP-0402-L_1_0_0_05-W_0_5-IPC_A 141.001,156 r90 top
C19 "100n" FP-0402-L_1_0_0_05-W_0_5-IPC_A 146.001,156 r90 top
C20 "100n" FP-0402-L_1_0_0_05-W_0_5-IPC_A 135.001,156 r90 top
C21 "100n" FP-0402-L_1_0_0_05-W_0_5-IPC_A 124.001,155 r0 top
C22 "100n" FP-0402-L_1_0_0_05-W_0_5-IPC_A 118.001,156 r90 top
C23 "1u" FP-0402-L_1_0_0_05-W_0_5-IPC_A 100.001,156 r90 top
C24 "100n" FP-0402-L_1_0_0_05-W_0_5-IPC_A 106.001,156 r90 top
C25 "10u" FP-0402-L_1_0_0_05-W_0_5-IPC_A 77.001,156 r90 top
C26 "100n" FP-0402-L_1_0_0_05-W_0_5-IPC_A 83.001,156 r90 top
C27 "100n" FP-0402-L_1_0_0_05-W_0_5-IPC_A 71.001,156 r90 top
C28 "1u" FP-0402-L_1_0_0_05-W_0_5-IPC_A 59.001,156 r90 top
C29 "100n" FP-0402-L_1_0_0_05-W_0_5-IPC_A 65.001,156 r90 top
C30 "100n" FP-0402-L_1_0_0_05-W_0_5-IPC_A 54.001,156 r90 top
C31_PHY_0 "100n" FP-0402-L_1_0_0_05-W_0_5-IPC_A 229.75,249.25 r180 top (schematic designator C31)
C31_PHY_1 "100n" FP-0402-L_1_0_0_05-W_0_5-IPC_A 236.25,236.75 r180 top (schematic designator C31)
C31_PHY_2 "100n" FP-0402-L_1_0_0_05-W_0_5-IPC_A 216.25,236.75 r180 top (schematic designator C31)
C31_PHY_3 "100n" FP-0402-L_1_0_0_05-W_0_5-IPC_A 209.75,238.25 r0 top (schematic designator C31)
C31_PHY_4 "100n" FP-0402-L_1_0_0_05-W_0_5-IPC_A 189.75,238.25 r0 top (schematic designator C31)
C31_PHY_5 "100n" FP-0402-L_1_0_0_05-W_0_5-IPC_A 196.25,250.75 r0 top (schematic designator C31)
C32_PHY_0 "100n" FP-0402-L_1_0_0_05-W_0_5-IPC_A 229.75,250.75 r180 top (schematic designator C32)
C32_PHY_1 "100n" FP-0402-L_1_0_0_05-W_0_5-IPC_A 236.25,238.25 r180 top (schematic designator C32)
C32_PHY_2 "100n" FP-0402-L_1_0_0_05-W_0_5-IPC_A 216.25,238.25 r180 top (schematic designator C32)
C32_PHY_3 "100n" FP-0402-L_1_0_0_05-W_0_5-IPC_A 209.75,236.75 r0 top (schematic designator C32)
C32_PHY_4 "100n" FP-0402-L_1_0_0_05-W_0_5-IPC_A 189.75,236.75 r0 top (schematic designator C32)
C32_PHY_5 "100n" FP-0402-L_1_0_0_05-W_0_5-IPC_A 196.25,249.25 r0 top (schematic designator C32)
C33_PHY_0 "4.7n" FP-0402-L_1_0_0_05-W_0_5-IPC_A 245,268.979 r270 top (schematic designator C33)
C33_PHY_1 "4.7n" FP-0402-L_1_0_0_05-W_0_5-IPC_A 224.979,338 r180 top (schematic designator C33)
C33_PHY_2 "4.7n" FP-0402-L_1_0_0_05-W_0_5-IPC_A 204.979,338 r180 top (schematic designator C33)
C33_PHY_3 "4.7n" FP-0402-L_1_0_0_05-W_0_5-IPC_A 189.979,343 r180 top (schematic designator C33)
C33_PHY_4 "4.7n" FP-0402-L_1_0_0_05-W_0_5-IPC_A 169.979,343 r180 top (schematic designator C33)
C33_PHY_5 "4.7n" FP-0402-L_1_0_0_05-W_0_5-IPC_A 184,272.021 r90 top (schematic designator C33)
C34_PHY_0 "100p" FP-0402-L_1_0_0_05-W_0_5-IPC_A 242.75,242.5 r270 top (schematic designator C34)
C34_PHY_1 "100p" FP-0402-L_1_0_0_05-W_0_5-IPC_A 235.5,229.25 r180 top (schematic designator C34)
C34_PHY_2 "100p" FP-0402-L_1_0_0_05-W_0_5-IPC_A 215.5,229.25 r180 top (schematic designator C34)
C34_PHY_3 "100p" FP-0402-L_1_0_0_05-W_0_5-IPC_A 195.5,229.25 r180 top (schematic designator C34)
C34_PHY_4 "100p" FP-0402-L_1_0_0_05-W_0_5-IPC_A 175.5,229.25 r180 top (schematic designator C34)
C34_PHY_5 "100p" FP-0402-L_1_0_0_05-W_0_5-IPC_A 183,257.5 r90 top (schematic designator C34)
C35_PHY_0 "1u" FP-0402-L_1_0_0_05-W_0_5-IPC_A 235.5,254.5 r180 top (schematic designator C35)
C35_PHY_1 "1u" FP-0402-L_1_0_0_05-W_0_5-IPC_A 247,235.521 r90 top (schematic designator C35)
C35_PHY_2 "1u" FP-0402-L_1_0_0_05-W_0_5-IPC_A 227,235.521 r90 top (schematic designator C35)
C35_PHY_3 "1u" FP-0402-L_1_0_0_05-W_0_5-IPC_A 210.5,235.25 r0 top (schematic designator C35)
C35_PHY_4 "1u" FP-0402-L_1_0_0_05-W_0_5-IPC_A 188,233.75 r180 top (schematic designator C35)
C35_PHY_5 "1u" FP-0402-L_1_0_0_05-W_0_5-IPC_A 190.5,245.5 r0 top (schematic designator C35)
C36_PHY_0 "4.7u" FP-0402-L_1_0_0_05-W_0_5-IPC_A 243.5,246.5 r90 bottom (schematic designator C36)
C36_PHY_1 "4.7u" FP-0402-L_1_0_0_05-W_0_5-IPC_A 239.5,228.5 r0 bottom (schematic designator C36)
C36_PHY_2 "4.7u" FP-0402-L_1_0_0_05-W_0_5-IPC_A 219.5,228.5 r0 bottom (schematic designator C36)
C36_PHY_3 "4.7u" FP-0402-L_1_0_0_05-W_0_5-IPC_A 199.5,228.5 r0 bottom (schematic designator C36)
C36_PHY_4 "4.7u" FP-0402-L_1_0_0_05-W_0_5-IPC_A 179.5,228.5 r0 bottom (schematic designator C36)
C36_PHY_5 "4.7u" FP-0402-L_1_0_0_05-W_0_5-IPC_A 182.5,253.5 r270 bottom (schematic designator C36)
C37_PHY_0 "100n" FP-0402-L_1_0_0_05-W_0_5-IPC_A 244.75,246.5 r90 bottom (schematic designator C37)
C37_PHY_1 "100n" FP-0402-L_1_0_0_05-W_0_5-IPC_A 239.5,227.25 r0 bottom (schematic designator C37)
C37_PHY_2 "100n" FP-0402-L_1_0_0_05-W_0_5-IPC_A 219.5,227.25 r0 bottom (schematic designator C37)
C37_PHY_3 "100n" FP-0402-L_1_0_0_05-W_0_5-IPC_A 199.5,227.25 r0 bottom (schematic designator C37)
C37_PHY_4 "100n" FP-0402-L_1_0_0_05-W_0_5-IPC_A 179.5,227.25 r0 bottom (schematic designator C37)
C37_PHY_5 "100n" FP-0402-L_1_0_0_05-W_0_5-IPC_A 181.25,253.5 r270 bottom (schematic designator C37)
C38_PHY_0 "1u" FP-0402-L_1_0_0_05-W_0_5-IPC_A 244.75,253.5 r270 bottom (schematic designator C38)
C38_PHY_1 "1u" FP-0402-L_1_0_0_05-W_0_5-IPC_A 246.5,227.25 r180 bottom (schematic designator C38)
C38_PHY_2 "1u" FP-0402-L_1_0_0_05-W_0_5-IPC_A 226.5,227.25 r180 bottom (schematic designator C38)
C38_PHY_3 "1u" FP-0402-L_1_0_0_05-W_0_5-IPC_A 206.5,227.25 r180 bottom (schematic designator C38)
C38_PHY_4 "1u" FP-0402-L_1_0_0_05-W_0_5-IPC_A 186.5,227.25 r180 bottom (schematic designator C38)
C38_PHY_5 "1u" FP-0402-L_1_0_0_05-W_0_5-IPC_A 181.25,246.5 r90 bottom (schematic designator C38)
C39_PHY_0 "100n" FP-0402-L_1_0_0_05-W_0_5-IPC_A 246,246.5 r90 bottom (schematic designator C39)
C39_PHY_1 "100n" FP-0402-L_1_0_0_05-W_0_5-IPC_A 239.5,226 r0 bottom (schematic designator C39)
C39_PHY_2 "100n" FP-0402-L_1_0_0_05-W_0_5-IPC_A 219.5,226 r0 bottom (schematic designator C39)
C39_PHY_3 "100n" FP-0402-L_1_0_0_05-W_0_5-IPC_A 199.5,226 r0 bottom (schematic designator C39)
C39_PHY_4 "100n" FP-0402-L_1_0_0_05-W_0_5-IPC_A 179.5,226 r0 bottom (schematic designator C39)
C39_PHY_5 "100n" FP-0402-L_1_0_0_05-W_0_5-IPC_A 180,253.5 r270 bottom (schematic designator C39)
C40_PHY_0 "100n" FP-0402-L_1_0_0_05-W_0_5-IPC_A 246.5,249.75 r180 bottom (schematic designator C40)
C40_PHY_1 "100n" FP-0402-L_1_0_0_05-W_0_5-IPC_A 242.75,225.5 r90 bottom (schematic designator C40)
C40_PHY_2 "100n" FP-0402-L_1_0_0_05-W_0_5-IPC_A 222.75,225.5 r90 bottom (schematic designator C40)
C40_PHY_3 "100n" FP-0402-L_1_0_0_05-W_0_5-IPC_A 202.75,225.5 r90 bottom (schematic designator C40)
C40_PHY_4 "100n" FP-0402-L_1_0_0_05-W_0_5-IPC_A 182.75,225.5 r90 bottom (schematic designator C40)
C40_PHY_5 "100n" FP-0402-L_1_0_0_05-W_0_5-IPC_A 179.5,250.25 r0 bottom (schematic designator C40)
C41_PHY_0 "100n" FP-0402-L_1_0_0_05-W_0_5-IPC_A 243.5,253.5 r270 bottom (schematic designator C41)
C41_PHY_1 "100n" FP-0402-L_1_0_0_05-W_0_5-IPC_A 246.5,228.5 r180 bottom (schematic designator C41)
C41_PHY_2 "100n" FP-0402-L_1_0_0_05-W_0_5-IPC_A 226.5,228.5 r180 bottom (schematic designator C41)
C41_PHY_3 "100n" FP-0402-L_1_0_0_05-W_0_5-IPC_A 206.5,228.5 r180 bottom (schematic designator C41)
C41_PHY_4 "100n" FP-0402-L_1_0_0_05-W_0_5-IPC_A 186.5,228.5 r180 bottom (schematic designator C41)
C41_PHY_5 "100n" FP-0402-L_1_0_0_05-W_0_5-IPC_A 182.5,246.5 r90 bottom (schematic designator C41)
C42_PHY_0 "1u" FP-0402-L_1_0_0_05-W_0_5-IPC_A 237.5,249.75 r180 bottom (schematic designator C42)
C42_PHY_1 "1u" FP-0402-L_1_0_0_05-W_0_5-IPC_A 242.75,234.5 r90 bottom (schematic designator C42)
C42_PHY_2 "1u" FP-0402-L_1_0_0_05-W_0_5-IPC_A 222.75,234.5 r90 bottom (schematic designator C42)
C42_PHY_3 "1u" FP-0402-L_1_0_0_05-W_0_5-IPC_A 202.75,234.5 r90 bottom (schematic designator C42)
C42_PHY_4 "1u" FP-0402-L_1_0_0_05-W_0_5-IPC_A 182.75,234.5 r90 bottom (schematic designator C42)
C42_PHY_5 "1u" FP-0402-L_1_0_0_05-W_0_5-IPC_A 188.5,250.25 r0 bottom (schematic designator C42)
C43_PHY_0 "100n" FP-0402-L_1_0_0_05-W_0_5-IPC_A 239.5,247.25 r0 bottom (schematic designator C43)
C43_PHY_1 "100n" FP-0402-L_1_0_0_05-W_0_5-IPC_A 240.25,232.5 r270 bottom (schematic designator C43)
C43_PHY_2 "100n" FP-0402-L_1_0_0_05-W_0_5-IPC_A 220.25,232.5 r270 bottom (schematic designator C43)
C43_PHY_3 "100n" FP-0402-L_1_0_0_05-W_0_5-IPC_A 200.25,232.5 r270 bottom (schematic designator C43)
C43_PHY_4 "100n" FP-0402-L_1_0_0_05-W_0_5-IPC_A 180.25,232.5 r270 bottom (schematic designator C43)
C43_PHY_5 "100n" FP-0402-L_1_0_0_05-W_0_5-IPC_A 186.5,252.75 r180 bottom (schematic designator C43)
C44_PHY_0 "100n" FP-0402-L_1_0_0_05-W_0_5-IPC_A 239.5,249.75 r0 bottom (schematic designator C44)
C44_PHY_1 "100n" FP-0402-L_1_0_0_05-W_0_5-IPC_A 242.75,232.5 r270 bottom (schematic designator C44)
C44_PHY_2 "100n" FP-0402-L_1_0_0_05-W_0_5-IPC_A 222.75,232.5 r270 bottom (schematic designator C44)
C44_PHY_3 "100n" FP-0402-L_1_0_0_05-W_0_5-IPC_A 202.75,232.5 r270 bottom (schematic designator C44)
C44_PHY_4 "100n" FP-0402-L_1_0_0_05-W_0_5-IPC_A 182.75,232.5 r270 bottom (schematic designator C44)
C44_PHY_5 "100n" FP-0402-L_1_0_0_05-W_0_5-IPC_A 186.5,250.25 r180 bottom (schematic designator C44)
C45_PHY_0 "100n" FP-0402-L_1_0_0_05-W_0_5-IPC_A 242.25,246.5 r90 bottom (schematic designator C45)
C45_PHY_1 "100n" FP-0402-L_1_0_0_05-W_0_5-IPC_A 239.5,229.75 r0 bottom (schematic designator C45)
C45_PHY_2 "100n" FP-0402-L_1_0_0_05-W_0_5-IPC_A 219.5,229.75 r0 bottom (schematic designator C45)
C45_PHY_3 "100n" FP-0402-L_1_0_0_05-W_0_5-IPC_A 199.5,229.75 r0 bottom (schematic designator C45)
C45_PHY_4 "100n" FP-0402-L_1_0_0_05-W_0_5-IPC_A 179.5,229.75 r0 bottom (schematic designator C45)
C45_PHY_5 "100n" FP-0402-L_1_0_0_05-W_0_5-IPC_A 183.75,253.5 r270 bottom (schematic designator C45)
C46_PHY_0 "100n" FP-0402-L_1_0_0_05-W_0_5-IPC_A 246.5,252.25 r180 bottom (schematic designator C46)
C46_PHY_1 "100n" FP-0402-L_1_0_0_05-W_0_5-IPC_A 245.25,225.5 r90 bottom (schematic designator C46)
C46_PHY_2 "100n" FP-0402-L_1_0_0_05-W_0_5-IPC_A 225.25,225.5 r90 bottom (schematic designator C46)
C46_PHY_3 "100n" FP-0402-L_1_0_0_05-W_0_5-IPC_A 205.25,225.5 r90 bottom (schematic designator C46)
C46_PHY_4 "100n" FP-0402-L_1_0_0_05-W_0_5-IPC_A 185.25,225.5 r90 bottom (schematic designator C46)
C46_PHY_5 "100n" FP-0402-L_1_0_0_05-W_0_5-IPC_A 179.5,247.75 r0 bottom (schematic designator C46)
C47_PHY_0 "4.7u" FP-0402-L_1_0_0_05-W_0_5-IPC_A 246.5,253.5 r180 bottom (schematic designator C47)
C47_PHY_1 "4.7u" FP-0402-L_1_0_0_05-W_0_5-IPC_A 246.5,225.5 r90 bottom (schematic designator C47)
C47_PHY_2 "4.7u" FP-0402-L_1_0_0_05-W_0_5-IPC_A 226.5,225.5 r90 bottom (schematic designator C47)
C47_PHY_3 "4.7u" FP-0402-L_1_0_0_05-W_0_5-IPC_A 206.5,225.5 r90 bottom (schematic designator C47)
C47_PHY_4 "4.7u" FP-0402-L_1_0_0_05-W_0_5-IPC_A 186.5,225.5 r90 bottom (schematic designator C47)
C47_PHY_5 "4.7u" FP-0402-L_1_0_0_05-W_0_5-IPC_A 179.5,246.5 r0 bottom (schematic designator C47)
C48_PHY_0 "4.7u" FP-0402-L_1_0_0_05-W_0_5-IPC_A 239.5,253.5 r0 bottom (schematic designator C48)
C48_PHY_1 "4.7u" FP-0402-L_1_0_0_05-W_0_5-IPC_A 246.5,232.5 r270 bottom (schematic designator C48)
C48_PHY_2 "4.7u" FP-0402-L_1_0_0_05-W_0_5-IPC_A 226.5,232.5 r270 bottom (schematic designator C48)
C48_PHY_3 "4.7u" FP-0402-L_1_0_0_05-W_0_5-IPC_A 206.5,232.5 r270 bottom (schematic designator C48)
C48_PHY_4 "4.7u" FP-0402-L_1_0_0_05-W_0_5-IPC_A 186.5,232.5 r270 bottom (schematic designator C48)
C48_PHY_5 "4.7u" FP-0402-L_1_0_0_05-W_0_5-IPC_A 186.5,246.5 r180 bottom (schematic designator C48)
C49_PHY_0 "100n" FP-0402-L_1_0_0_05-W_0_5-IPC_A 239.5,246 r0 bottom (schematic designator C49)
C49_PHY_1 "100n" FP-0402-L_1_0_0_05-W_0_5-IPC_A 239,232.5 r270 bottom (schematic designator C49)
C49_PHY_2 "100n" FP-0402-L_1_0_0_05-W_0_5-IPC_A 219,232.5 r270 bottom (schematic designator C49)
C49_PHY_3 "100n" FP-0402-L_1_0_0_05-W_0_5-IPC_A 199,232.5 r270 bottom (schematic designator C49)
C49_PHY_4 "100n" FP-0402-L_1_0_0_05-W_0_5-IPC_A 179,232.5 r270 bottom (schematic designator C49)
C49_PHY_5 "100n" FP-0402-L_1_0_0_05-W_0_5-IPC_A 186.5,254 r180 bottom (schematic designator C49)
C50_PHY_0 "100n" FP-0402-L_1_0_0_05-W_0_5-IPC_A 239.5,248.5 r0 bottom (schematic designator C50)
C50_PHY_1 "100n" FP-0402-L_1_0_0_05-W_0_5-IPC_A 241.5,232.5 r270 bottom (schematic designator C50)
C50_PHY_2 "100n" FP-0402-L_1_0_0_05-W_0_5-IPC_A 221.5,232.5 r270 bottom (schematic designator C50)
C50_PHY_3 "100n" FP-0402-L_1_0_0_05-W_0_5-IPC_A 201.5,232.5 r270 bottom (schematic designator C50)
C50_PHY_4 "100n" FP-0402-L_1_0_0_05-W_0_5-IPC_A 181.5,232.5 r270 bottom (schematic designator C50)
C50_PHY_5 "100n" FP-0402-L_1_0_0_05-W_0_5-IPC_A 186.5,251.5 r180 bottom (schematic designator C50)
C51_PHY_0 "100n" FP-0402-L_1_0_0_05-W_0_5-IPC_A 239.5,251 r0 bottom (schematic designator C51)
C51_PHY_1 "100n" FP-0402-L_1_0_0_05-W_0_5-IPC_A 244,232.5 r270 bottom (schematic designator C51)
C51_PHY_2 "100n" FP-0402-L_1_0_0_05-W_0_5-IPC_A 224,232.5 r270 bottom (schematic designator C51)
C51_PHY_3 "100n" FP-0402-L_1_0_0_05-W_0_5-IPC_A 204,232.5 r270 bottom (schematic designator C51)
C51_PHY_4 "100n" FP-0402-L_1_0_0_05-W_0_5-IPC_A 184,232.5 r270 bottom (schematic designator C51)
C51_PHY_5 "100n" FP-0402-L_1_0_0_05-W_0_5-IPC_A 186.5,249 r180 bottom (schematic designator C51)
C52_PHY_0 "100n" FP-0402-L_1_0_0_05-W_0_5-IPC_A 239.5,252.25 r0 bottom (schematic designator C52)
C52_PHY_1 "100n" FP-0402-L_1_0_0_05-W_0_5-IPC_A 245.25,232.5 r270 bottom (schematic designator C52)
C52_PHY_2 "100n" FP-0402-L_1_0_0_05-W_0_5-IPC_A 225.25,232.5 r270 bottom (schematic designator C52)
C52_PHY_3 "100n" FP-0402-L_1_0_0_05-W_0_5-IPC_A 205.25,232.5 r270 bottom (schematic designator C52)
C52_PHY_4 "100n" FP-0402-L_1_0_0_05-W_0_5-IPC_A 185.25,232.5 r270 bottom (schematic designator C52)
C52_PHY_5 "100n" FP-0402-L_1_0_0_05-W_0_5-IPC_A 186.5,247.75 r180 bottom (schematic designator C52)
C53_PHY_0 "4.7u" FP-0402-L_1_0_0_05-W_0_5-IPC_A 241.25,246.5 r90 bottom (schematic designator C53)
C53_PHY_1 "4.7u" FP-0402-L_1_0_0_05-W_0_5-IPC_A 239.5,230.75 r0 bottom (schematic designator C53)
C53_PHY_2 "4.7u" FP-0402-L_1_0_0_05-W_0_5-IPC_A 219.5,230.75 r0 bottom (schematic designator C53)
C53_PHY_3 "4.7u" FP-0402-L_1_0_0_05-W_0_5-IPC_A 199.5,230.75 r0 bottom (schematic designator C53)
C53_PHY_4 "4.7u" FP-0402-L_1_0_0_05-W_0_5-IPC_A 179.5,230.75 r0 bottom (schematic designator C53)
C53_PHY_5 "4.7u" FP-0402-L_1_0_0_05-W_0_5-IPC_A 184.75,253.5 r270 bottom (schematic designator C53)
C54_PHY_0 "100n" FP-0402-L_1_0_0_05-W_0_5-IPC_A 239.5,244.75 r180 bottom (schematic designator C54)
C54_PHY_1 "100n" FP-0402-L_1_0_0_05-W_0_5-IPC_A 237.75,232.5 r90 bottom (schematic designator C54)
C54_PHY_2 "100n" FP-0402-L_1_0_0_05-W_0_5-IPC_A 217.75,232.5 r90 bottom (schematic designator C54)
C54_PHY_3 "100n" FP-0402-L_1_0_0_05-W_0_5-IPC_A 197.75,232.5 r90 bottom (schematic designator C54)
C54_PHY_4 "100n" FP-0402-L_1_0_0_05-W_0_5-IPC_A 177.75,232.5 r90 bottom (schematic designator C54)
C54_PHY_5 "100n" FP-0402-L_1_0_0_05-W_0_5-IPC_A 186.5,255.25 r0 bottom (schematic designator C54)
C55_PHY_0 "4.7u" FP-0402-L_1_0_0_05-W_0_5-IPC_A 242.25,253.5 r270 bottom (schematic designator C55)
C55_PHY_1 "4.7u" FP-0402-L_1_0_0_05-W_0_5-IPC_A 246.5,229.75 r180 bottom (schematic designator C55)
C55_PHY_2 "4.7u" FP-0402-L_1_0_0_05-W_0_5-IPC_A 226.5,229.75 r180 bottom (schematic designator C55)
C55_PHY_3 "4.7u" FP-0402-L_1_0_0_05-W_0_5-IPC_A 206.5,229.75 r180 bottom (schematic designator C55)
C55_PHY_4 "4.7u" FP-0402-L_1_0_0_05-W_0_5-IPC_A 186.5,229.75 r180 bottom (schematic designator C55)
C55_PHY_5 "4.7u" FP-0402-L_1_0_0_05-W_0_5-IPC_A 183.75,246.5 r90 bottom (schematic designator C55)
C56_PHY_0 "100n" FP-0402-L_1_0_0_05-W_0_5-IPC_A 241,253.5 r270 bottom (schematic designator C56)
C56_PHY_1 "100n" FP-0402-L_1_0_0_05-W_0_5-IPC_A 246.5,231 r180 bottom (schematic designator C56)
C56_PHY_2 "100n" FP-0402-L_1_0_0_05-W_0_5-IPC_A 226.5,231 r180 bottom (schematic designator C56)
C56_PHY_3 "100n" FP-0402-L_1_0_0_05-W_0_5-IPC_A 206.5,231 r180 bottom (schematic designator C56)
C56_PHY_4 "100n" FP-0402-L_1_0_0_05-W_0_5-IPC_A 186.5,231 r180 bottom (schematic designator C56)
C56_PHY_5 "100n" FP-0402-L_1_0_0_05-W_0_5-IPC_A 185,246.5 r90 bottom (schematic designator C56)
C57_PHY_0 "100n" FP-0402-L_1_0_0_05-W_0_5-IPC_A 246.5,248.5 r180 bottom (schematic designator C57)
C57_PHY_1 "100n" FP-0402-L_1_0_0_05-W_0_5-IPC_A 241.5,225.5 r90 bottom (schematic designator C57)
C57_PHY_2 "100n" FP-0402-L_1_0_0_05-W_0_5-IPC_A 221.5,225.5 r90 bottom (schematic designator C57)
C57_PHY_3 "100n" FP-0402-L_1_0_0_05-W_0_5-IPC_A 201.5,225.5 r90 bottom (schematic designator C57)
C57_PHY_4 "100n" FP-0402-L_1_0_0_05-W_0_5-IPC_A 181.5,225.5 r90 bottom (schematic designator C57)
C57_PHY_5 "100n" FP-0402-L_1_0_0_05-W_0_5-IPC_A 179.5,251.5 r0 bottom (schematic designator C57)
C58_PHY_0 "100n" FP-0402-L_1_0_0_05-W_0_5-IPC_A 246.5,251 r180 bottom (schematic designator C58)
C58_PHY_1 "100n" FP-0402-L_1_0_0_05-W_0_5-IPC_A 244,225.5 r90 bottom (schematic designator C58)
C58_PHY_2 "100n" FP-0402-L_1_0_0_05-W_0_5-IPC_A 224,225.5 r90 bottom (schematic designator C58)
C58_PHY_3 "100n" FP-0402-L_1_0_0_05-W_0_5-IPC_A 204,225.5 r90 bottom (schematic designator C58)
C58_PHY_4 "100n" FP-0402-L_1_0_0_05-W_0_5-IPC_A 184,225.5 r90 bottom (schematic designator C58)
C58_PHY_5 "100n" FP-0402-L_1_0_0_05-W_0_5-IPC_A 179.5,249 r0 bottom (schematic designator C58)
C59_SJA1150Q_PINOUT_0 "100p" FP-0402-L_1_0_0_05-W_0_5-IPC_A 958.001,245 r90 top (schematic designator C59)
C59_SJA1150Q_PINOUT_1 "100p" FP-0402-L_1_0_0_05-W_0_5-IPC_A 916.001,276.001 r90 top (schematic designator C59)
C60_SJA1150Q_PINOUT_0 "1u" FP-0402-L_1_0_0_05-W_0_5-IPC_A 860.001,245 r90 top (schematic designator C60)
C60_SJA1150Q_PINOUT_1 "1u" FP-0402-L_1_0_0_05-W_0_5-IPC_A 821.001,276.001 r90 top (schematic designator C60)
C61_SJA1150Q_PINOUT_0 "100n" FP-0402-L_1_0_0_05-W_0_5-IPC_A 893.001,245 r90 top (schematic designator C61)
C61_SJA1150Q_PINOUT_1 "100n" FP-0402-L_1_0_0_05-W_0_5-IPC_A 853.001,276.001 r90 top (schematic designator C61)
C62_SJA1150Q_PINOUT_0 "1u" FP-0402-L_1_0_0_05-W_0_5-IPC_A 795.001,245 r90 top (schematic designator C62)
C62_SJA1150Q_PINOUT_1 "1u" FP-0402-L_1_0_0_05-W_0_5-IPC_A 757.001,276.001 r90 top (schematic designator C62)
C63_SJA1150Q_PINOUT_0 "100n" FP-0402-L_1_0_0_05-W_0_5-IPC_A 828.001,245 r90 top (schematic designator C63)
C63_SJA1150Q_PINOUT_1 "100n" FP-0402-L_1_0_0_05-W_0_5-IPC_A 789.001,276.001 r90 top (schematic designator C63)
C64_SJA1150Q_PINOUT_0 "1u" FP-0402-L_1_0_0_05-W_0_5-IPC_A 698.001,245 r90 top (schematic designator C64)
C64_SJA1150Q_PINOUT_1 "1u" FP-0402-L_1_0_0_05-W_0_5-IPC_A 661.001,276.001 r90 top (schematic designator C64)
C65_SJA1150Q_PINOUT_0 "100n" FP-0402-L_1_0_0_05-W_0_5-IPC_A 730.001,245 r90 top (schematic designator C65)
C65_SJA1150Q_PINOUT_1 "100n" FP-0402-L_1_0_0_05-W_0_5-IPC_A 693.001,276.001 r90 top (schematic designator C65)
C66_SJA1150Q_PINOUT_0 "100n" FP-0402-L_1_0_0_05-W_0_5-IPC_A 763.001,245 r90 top (schematic designator C66)
C66_SJA1150Q_PINOUT_1 "100n" FP-0402-L_1_0_0_05-W_0_5-IPC_A 725.001,276.001 r90 top (schematic designator C66)
C67_SJA1150Q_PINOUT_0 "1u" FP-0402-L_1_0_0_05-W_0_5-IPC_A 600.001,245 r90 top (schematic designator C67)
C67_SJA1150Q_PINOUT_1 "1u" FP-0402-L_1_0_0_05-W_0_5-IPC_A 565.001,276.001 r90 top (schematic designator C67)
C68_SJA1150Q_PINOUT_0 "100n" FP-0402-L_1_0_0_05-W_0_5-IPC_A 633.001,245 r90 top (schematic designator C68)
C68_SJA1150Q_PINOUT_1 "100n" FP-0402-L_1_0_0_05-W_0_5-IPC_A 597.001,276.001 r90 top (schematic designator C68)
C69_SJA1150Q_PINOUT_0 "100n" FP-0402-L_1_0_0_05-W_0_5-IPC_A 665.001,245 r90 top (schematic designator C69)
C69_SJA1150Q_PINOUT_1 "100n" FP-0402-L_1_0_0_05-W_0_5-IPC_A 629.001,276.001 r90 top (schematic designator C69)
C70_SJA1150Q_PINOUT_0 "1u" FP-0402-L_1_0_0_05-W_0_5-IPC_A 1198.001,431 r90 top (schematic designator C70)
C70_SJA1150Q_PINOUT_1 "1u" FP-0402-L_1_0_0_05-W_0_5-IPC_A 1178.001,463.001 r90 top (schematic designator C70)
C71_SJA1150Q_PINOUT_0 "1u" FP-0402-L_1_0_0_05-W_0_5-IPC_A 1231.001,431 r90 top (schematic designator C71)
C71_SJA1150Q_PINOUT_1 "1u" FP-0402-L_1_0_0_05-W_0_5-IPC_A 1210.001,463.001 r90 top (schematic designator C71)
C72_SJA1150Q_PINOUT_0 "100n" FP-0402-L_1_0_0_05-W_0_5-IPC_A 1263.001,431 r90 top (schematic designator C72)
C72_SJA1150Q_PINOUT_1 "100n" FP-0402-L_1_0_0_05-W_0_5-IPC_A 1242.001,463.001 r90 top (schematic designator C72)
C73_SJA1150Q_PINOUT_0 "100n" FP-0402-L_1_0_0_05-W_0_5-IPC_A 373.001,245 r90 top (schematic designator C73)
C73_SJA1150Q_PINOUT_1 "100n" FP-0402-L_1_0_0_05-W_0_5-IPC_A 1274.001,463.001 r90 top (schematic designator C73)
C74_SJA1150Q_PINOUT_0 "100n" FP-0402-L_1_0_0_05-W_0_5-IPC_A 405.001,245 r90 top (schematic designator C74)
C74_SJA1150Q_PINOUT_1 "100n" FP-0402-L_1_0_0_05-W_0_5-IPC_A 373.001,276.001 r90 top (schematic designator C74)
C75_SJA1150Q_PINOUT_0 "100n" FP-0402-L_1_0_0_05-W_0_5-IPC_A 438.001,245 r90 top (schematic designator C75)
C75_SJA1150Q_PINOUT_1 "100n" FP-0402-L_1_0_0_05-W_0_5-IPC_A 405.001,276.001 r90 top (schematic designator C75)
C76_SJA1150Q_PINOUT_0 "100n" FP-0402-L_1_0_0_05-W_0_5-IPC_A 470.001,245 r90 top (schematic designator C76)
C76_SJA1150Q_PINOUT_1 "100n" FP-0402-L_1_0_0_05-W_0_5-IPC_A 437.001,276.001 r90 top (schematic designator C76)
C77_SJA1150Q_PINOUT_0 "100n" FP-0402-L_1_0_0_05-W_0_5-IPC_A 503.001,245 r90 top (schematic designator C77)
C77_SJA1150Q_PINOUT_1 "100n" FP-0402-L_1_0_0_05-W_0_5-IPC_A 469.001,276.001 r90 top (schematic designator C77)
C78_SJA1150Q_PINOUT_0 "100n" FP-0402-L_1_0_0_05-W_0_5-IPC_A 535.001,245 r90 top (schematic designator C78)
C78_SJA1150Q_PINOUT_1 "100n" FP-0402-L_1_0_0_05-W_0_5-IPC_A 501.001,276.001 r90 top (schematic designator C78)
C79_SJA1150Q_PINOUT_0 "100n" FP-0402-L_1_0_0_05-W_0_5-IPC_A 568.001,245 r90 top (schematic designator C79)
C79_SJA1150Q_PINOUT_1 "100n" FP-0402-L_1_0_0_05-W_0_5-IPC_A 533.001,276.001 r90 top (schematic designator C79)
C80_SJA1150Q_PINOUT_0 "1u" FP-0402-L_1_0_0_05-W_0_5-IPC_A 1068.001,431 r90 top (schematic designator C80)
C80_SJA1150Q_PINOUT_1 "1u" FP-0402-L_1_0_0_05-W_0_5-IPC_A 1050.001,463.001 r90 top (schematic designator C80)
C81_SJA1150Q_PINOUT_0 "100n" FP-0402-L_1_0_0_05-W_0_5-IPC_A 1101.001,431 r90 top (schematic designator C81)
C81_SJA1150Q_PINOUT_1 "100n" FP-0402-L_1_0_0_05-W_0_5-IPC_A 1082.001,463.001 r90 top (schematic designator C81)
C82_SJA1150Q_PINOUT_0 "100n" FP-0402-L_1_0_0_05-W_0_5-IPC_A 1133.001,431 r90 top (schematic designator C82)
C82_SJA1150Q_PINOUT_1 "100n" FP-0402-L_1_0_0_05-W_0_5-IPC_A 1114.001,463.001 r90 top (schematic designator C82)
C83_SJA1150Q_PINOUT_0 "100n" FP-0402-L_1_0_0_05-W_0_5-IPC_A 1166.001,431 r90 top (schematic designator C83)
C83_SJA1150Q_PINOUT_1 "100n" FP-0402-L_1_0_0_05-W_0_5-IPC_A 1146.001,463.001 r90 top (schematic designator C83)
C84_SJA1150Q_PINOUT_0 "1u" FP-0402-L_1_0_0_05-W_0_5-IPC_A 938.001,431 r90 top (schematic designator C84)
C84_SJA1150Q_PINOUT_1 "1u" FP-0402-L_1_0_0_05-W_0_5-IPC_A 922.001,463.001 r90 top (schematic designator C84)
C85_SJA1150Q_PINOUT_0 "100n" FP-0402-L_1_0_0_05-W_0_5-IPC_A 971.001,431 r90 top (schematic designator C85)
C85_SJA1150Q_PINOUT_1 "100n" FP-0402-L_1_0_0_05-W_0_5-IPC_A 954.001,463.001 r90 top (schematic designator C85)
C86_SJA1150Q_PINOUT_0 "100n" FP-0402-L_1_0_0_05-W_0_5-IPC_A 1003.001,431 r90 top (schematic designator C86)
C86_SJA1150Q_PINOUT_1 "100n" FP-0402-L_1_0_0_05-W_0_5-IPC_A 986.001,463.001 r90 top (schematic designator C86)
C87_SJA1150Q_PINOUT_0 "100n" FP-0402-L_1_0_0_05-W_0_5-IPC_A 1036.001,431 r90 top (schematic designator C87)
C87_SJA1150Q_PINOUT_1 "100n" FP-0402-L_1_0_0_05-W_0_5-IPC_A 1018.001,463.001 r90 top (schematic designator C87)
C88_SJA1150Q_PINOUT_0 "1u" FP-0402-L_1_0_0_05-W_0_5-IPC_A 809.001,431 r90 top (schematic designator C88)
C88_SJA1150Q_PINOUT_1 "1u" FP-0402-L_1_0_0_05-W_0_5-IPC_A 794.001,463.001 r90 top (schematic designator C88)
C89_SJA1150Q_PINOUT_0 "100n" FP-0402-L_1_0_0_05-W_0_5-IPC_A 841.001,431 r90 top (schematic designator C89)